# Allegro board my_pcb01.brd
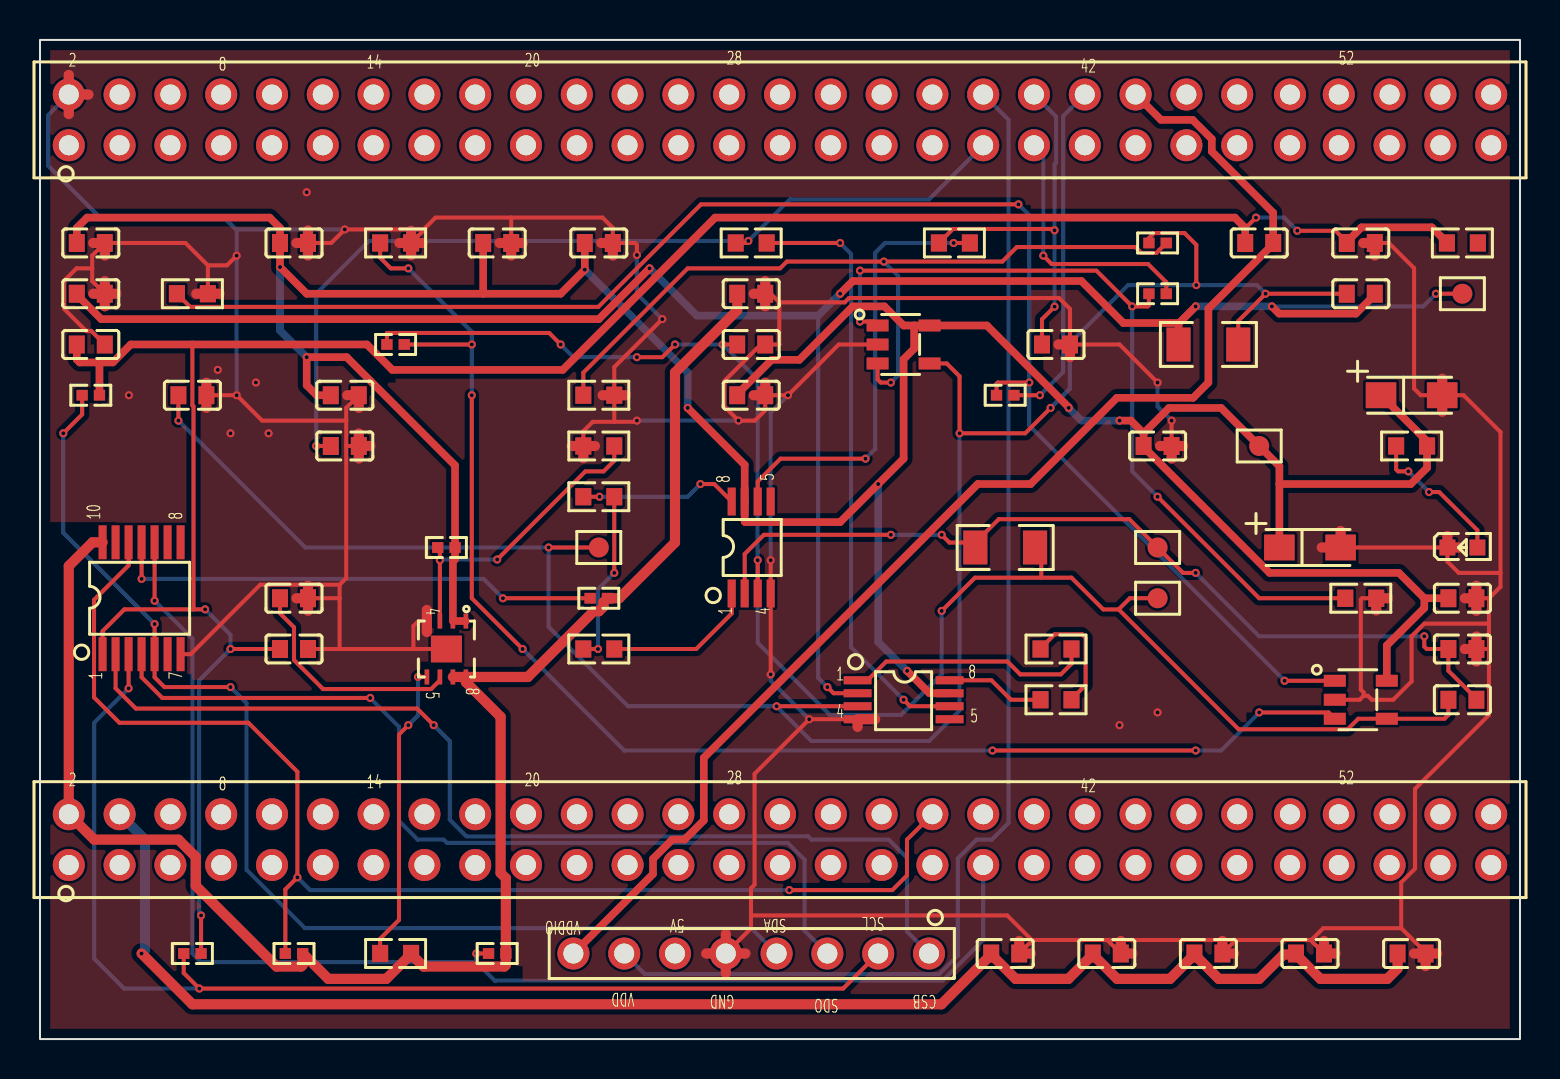
[diagram p0: board, top side]
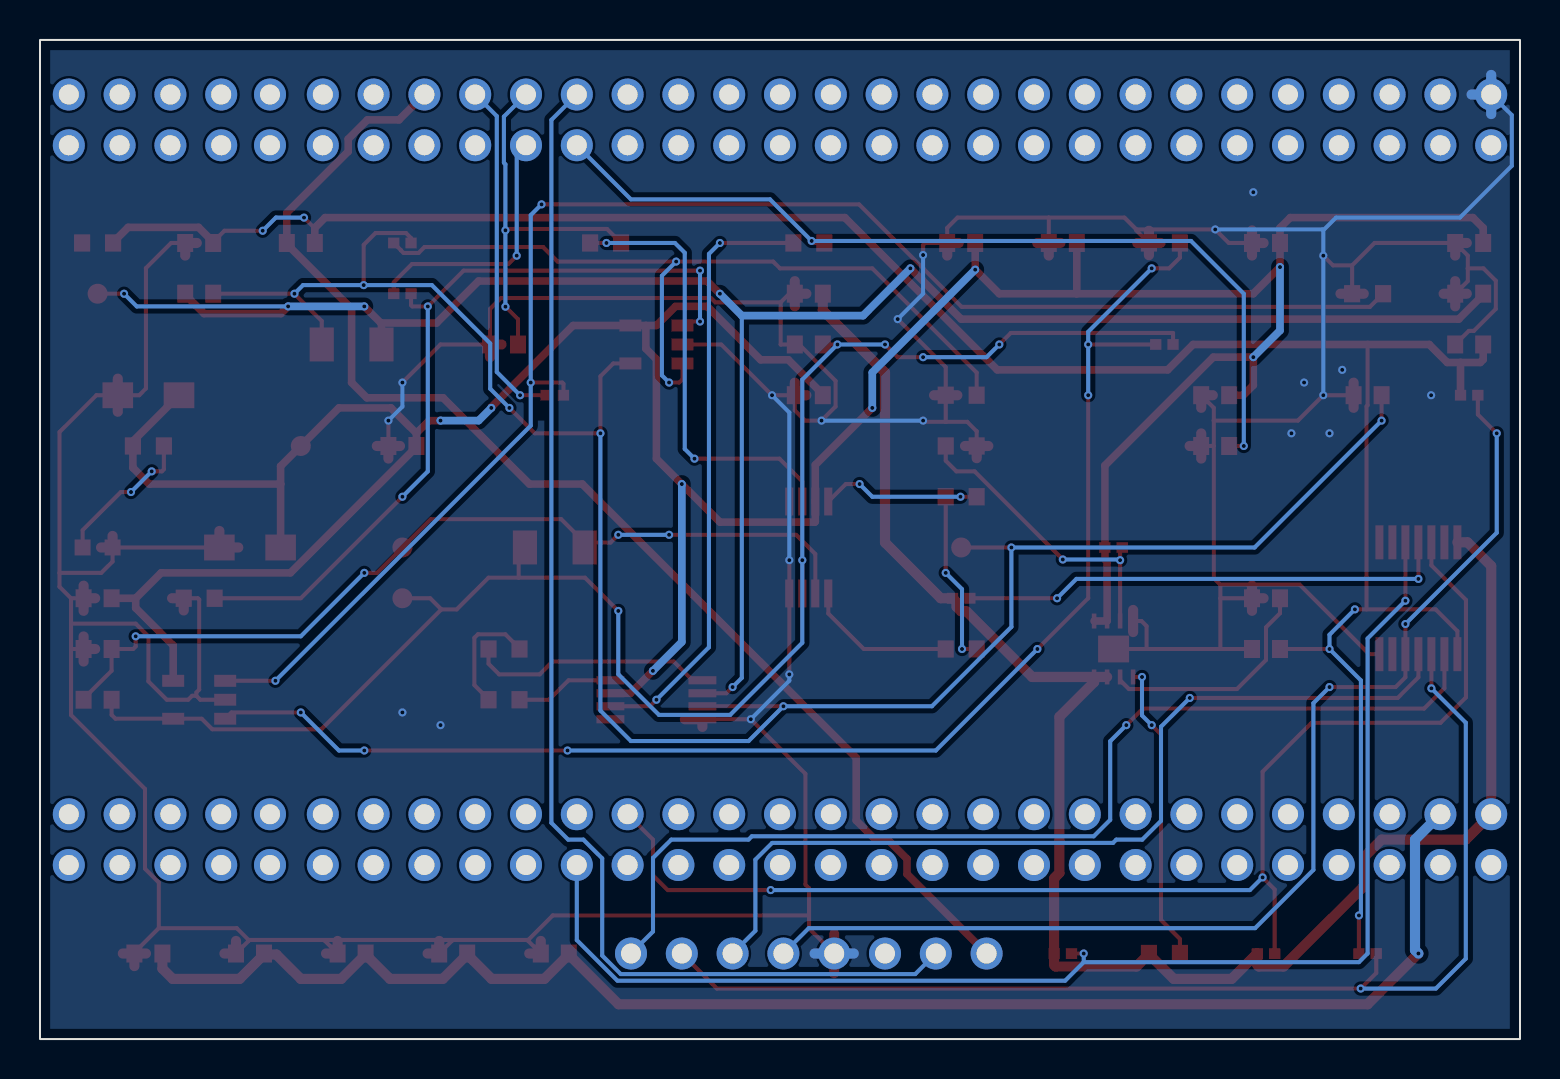
[diagram p1: board, bottom side, seen from below]

Outline 74 x 50 mm; copper layers: TOP, BOTTOM. Coordinates in mm from the lower left corner of the outline.
Outline path: rectangle 0,0 74,50

## Design rules (mm)
constraint set DEFAULT: min track width 0.203

## Placement (name value [footprint] x y rotation side)
C2  104  [C0603]  12.7 19.52 0 top
C3  104  [C0603]  2.54 34.76 0 top
C4  104  [C0603]  66.04 39.84 0 top
C5  104  [C0603]  48.26 4.28 0 top
C6  104  [C0603]  53.34 4.28 0 top
C7  104  [C0603]  58.42 4.28 0 top
C8  104  [C0603]  63.5 4.28 0 top
C9  104  [C0603]  68.58 4.28 0 top
C13  10uF  [C0603]  55.88 29.68 0 top
C14  10uF  [C0603]  27.94 39.84 0 top
C15  10uF  [C0603]  22.86 39.84 0 top
C16  10nF  [C0603]  35.56 34.76 0 top
C17  10nF  [C0603]  71.12 19.52 0 top
C18  10nF  [C0603]  71.12 16.98 0 top
C19  10nF  [C0603]  50.8 34.76 0 top
C20  10nF  [C0603]  66.04 37.3 0 top
C21  10nF  [C0603]  7.62 32.22 0 top
C22  10nF  [C0603]  2.54 37.3 0 top
C23  10nF  [C0603]  15.24 29.68 0 top
C24  10uF  [C0603]  15.24 32.22 0 top
C25  10uF  [C0603]  12.7 39.84 0 top
C26  10uF  [C0603]  71.12 22.06 0 top
C27  10uF  [C0603]  35.56 37.3 0 top
C28  10uF  [C0603]  35.56 32.22 0 top
C29  104  [C0603]  2.54 39.84 0 top
C30  10nF  [C0603]  12.7 22.06 0 top
C31  10uF  [CASE-A]  63.5 24.6 0 top
C32  10uF  [CASE-A]  68.58 32.22 0 top
C34  DNP  [C0603]  60.96 39.84 0 top
D1  YELLOW  [LED]  71.12 24.6 0 top
R5  4.7K  [R0402]  22.86 4.28 0 top
R6  4.7K  [R0402]  27.94 22.06 0 top
R7  4.7K  [R0402]  12.7 4.28 0 top
R8  100K  [R0603]  7.62 37.3 0 top
R9  4.7K  [R0402]  48.26 32.22 0 top
R10  10K  [R0603]  17.78 39.84 0 top
R11  4.7K  [R0402]  17.78 34.76 0 top
R12  10R  [R1206]  48.26 24.6 0 top
R13  470R  [R0603]  27.94 19.52 0 top
R14  0R  [R0603]  27.94 27.14 0 top
R15  100R  [R0603]  45.72 39.84 0 top
R16  100K  [R0603]  66.04 22.06 0 top
R17  10R  [R1206]  58.42 34.76 0 top
R18  4.7K  [R0402]  55.88 37.3 0 top
R19  10K  [R0603]  27.94 32.22 0 top
R20  4.7K  [R0402]  55.88 39.84 0 top
R21  470R  [R0603]  50.8 19.52 0 top
R22  0R  [R0603]  50.8 16.98 0 top
R23  100R  [R0603]  35.56 39.84 0 top
R24  4.7K  [R0402]  7.62 4.28 0 top
R25  4.7K  [R0402]  2.54 32.22 0 top
R26  4.7K  [R0402]  20.32 24.6 0 top
R27  10K  [R0603]  27.94 29.68 0 top
R28  1K  [R0603]  17.78 4.28 0 top
R29  1K  [R0603]  68.58 29.68 0 top
R31  0R  [R0603]  71.12 39.84 0 top
TP1  T POINT R  [TESTPOINT]  55.88 22.06 0 top
TP2  T POINT R  [TESTPOINT]  55.88 24.6 0 top
TP3  T POINT R  [TESTPOINT]  27.94 24.6 0 top
TP4  T POINT R  [TESTPOINT]  71.12 37.3 0 top
TP5  T POINT R  [TESTPOINT]  60.96 29.68 0 top
U3  pinheader_5802  [HDR2X29]  37 9.98 0 top
U4  pinheader_8  [HDR1X8]  35.56 4.28 180 top
U5  txs0104epwr  [TXS0104EPWR]  5.08 22.06 90 top
U6  LMV321/SOT  [LMV321]  66.04 16.98 0 top
U7  -  [COSINA333MRA]  35.56 24.6 90 top
U8  LMV321/SOT  [LMV321]  43.18 34.76 0 top
U9  -  [COSINA333MRA]  43.18 16.98 0 top
U11  pinheader_58  [HDR2X29]  37 46 0 top
U12  -  [TPS7A8001DRBR]  20.32 19.52 270 top

## Library data of the parts
C2-C9 C13-C30 C34 = CAP NP
C31 C32 = CAP POL
D1 = LED
R5-R29 R31 = R
TP1-TP5 = T POINT R
U3 = pinheader_5802
U4 = pinheader_8
U5 = txs0104epwr
U6 U8 = LMV321/SOT
U7 U9 = COSINA333MRA
U11 = pinheader_58
U12 = TPS7A8001DRBR

## Footprints (pads in the part's own frame, mm; a bottom-side part is the same pattern mirrored in y, then rotated)
C0603
  rect 0.8x0.9 smd: 1(-0.7,0) 2(0.7,0)
CASE-A
  rect 1.53x1.296 smd: 1(-1.53,0) 2(1.53,0)
COSINA333MRA
  rect 1.397x0.406 smd: 1(-2.3,0.975) 2(-2.3,0.325) 3(-2.3,-0.325) 4(-2.3,-0.975) 5(2.3,-0.975) 6(2.3,-0.325) 7(2.3,0.325) 8(2.3,0.975)
HDR1X8
  round 1.6 hole 1: 1(-8.89,0) 2(-6.35,0) 3(-3.81,0) 4(-1.27,0) 5(1.27,0) 6(3.81,0) 7(6.35,0) 8(8.89,0)
HDR2X29
  round 1.6 hole 1: 1(-35.56,-1.27) 2(-35.56,1.27) 3(-33.02,-1.27) 4(-33.02,1.27) 5(-30.48,-1.27) 6(-30.48,1.27) 7(-27.94,-1.27) 8(-27.94,1.27) 9(-25.4,-1.27) 10(-25.4,1.27) 11(-22.86,-1.27) 12(-22.86,1.27) 13(-20.32,-1.27) 14(-20.32,1.27) 15(-17.78,-1.27) 16(-17.78,1.27) 17(-15.24,-1.27) 18(-15.24,1.27) 19(-12.7,-1.27) 20(-12.7,1.27) 21(-10.16,-1.27) 22(-10.16,1.27) 23(-7.62,-1.27) 24(-7.62,1.27) 25(-5.08,-1.27) 26(-5.08,1.27) 27(-2.54,-1.27) 28(-2.54,1.27) 29(0,-1.27) 30(0,1.27) 31(2.54,-1.27) 32(2.54,1.27) 33(5.08,-1.27) 34(5.08,1.27) 35(7.62,-1.27) 36(7.62,1.27) 37(10.16,-1.27) 38(10.16,1.27) 39(12.7,-1.27) 40(12.7,1.27) 41(15.24,-1.27) 42(15.24,1.27) 43(17.78,-1.27) 44(17.78,1.27) 45(20.32,-1.27) 46(20.32,1.27) 47(22.86,-1.27) 48(22.86,1.27) 49(25.5,-1.27) 50(25.5,1.27) 51(27.94,-1.27) 52(27.94,1.27) 53(30.48,-1.27) 54(30.48,1.27) 55(33.02,-1.27) 56(33.02,1.27) 57(35.56,-1.27) 58(35.56,1.27)
LED
  rect 0.8x0.8 smd: 1(-0.749,0) 2(0.749,0)
LMV321
  rect 1.1x0.6 smd: 1(-1.3,0.95) 2(-1.3,0) 3(-1.3,-0.95) 4(1.3,-0.95) 5(1.3,0.95)
R0402
  rect 0.566x0.54 smd: 1(-0.433,0) 2(0.433,0)
R0603
  rect 0.806x0.864 smd: 1(-0.774,0) 2(0.774,0)
R1206
  rect 1.208x1.701 smd: 1(-1.493,0) 2(1.493,0)
TESTPOINT
  round 1 smd: 1(0,0)
TPS7A8001DRBR
  rect 0.75x0.23 smd: 1(-1.4,0.975) 2(-1.4,0.325) 3(-1.4,-0.325) 4(-1.4,-0.975) 5(1.4,-0.975) 6(1.4,-0.325) 7(1.4,0.325) 8(1.4,0.975)
  rect 1.34x1.55 smd: 9(0,0)
TXS0104EPWR
  rect 1.7x0.4 smd: 1(-2.8,1.95) 2(-2.8,1.3) 3(-2.8,0.65) 4(-2.8,0) 5(-2.8,-0.65) 6(-2.8,-1.3) 7(-2.8,-1.95) 8(2.8,-1.95) 9(2.8,-1.3) 10(2.8,-0.65) 11(2.8,0) 12(2.8,0.65) 13(2.8,1.3) 14(2.8,1.95)

## Nets
GND: C2.2 C3.2 C4.2 C5.2 C6.2 C7.2 C8.2 C9.2 C13.2 C14.2 C15.2 C16.2 C17.2 C19.2 C21.2 C22.2 C23.2 C24.2 C25.2 C26.2 C27.2 C28.2 C29.2 C30.2 C31.2 C32.2 D1.1(CATHODE) R8.2 R10.2 R16.2 R19.2 R27.1 U4.5 U5.7 U6.2 U7.4 U8.2 U9.4 U11.2 U12.4 U12.9
VCC_3V3: C5.1 C6.1 C7.1 C8.1 C9.1 U3.4
VCC_4V5: C13.1 C14.1 C15.1 C24.1 C25.1 C26.1 C28.1 C29.1 C31.1 C32.1 R26.2 R29.2 TP5.1(TP) U6.5 U7.7 U8.5 U9.7 U12.1 U12.2(OUT2)
VCC_5V: C27.1 R5.2 R6.2 R7.2 R28.2 U3.2 U5.14(VCCB) U12.7 U12.8
VCC_SENSOR: U4.7 U11.38
VCC_SENSOR_H: C2.1 C3.1 C4.1 C34.1 R24.2 R25.2 R31.1 U5.1
VDDIO: C34.2 U4.8 U11.44
CSB: U4.1 U5.2
CURRENT_ADC_OUT1: C19.1 R15.1 U11.40
CURRENT_ADC_OUT2: C23.1 R23.1 U11.37
IIC_CSB: U5.13
IIC_SCL: R7.1 U3.36 U5.12
IIC_SDA: R5.1 U3.37 U5.10
IIC_SDO: R6.1 U5.11
SCL_CLK: R24.1 U4.2 U5.3
SDA_MOSI: R25.1 U4.4 U5.5
SDO_MISO: U4.3 U5.4
TXS_OE: U5.8
VOLTAGE_IN1: R9.2 U11.42
VOLTAGE_IN2: R18.2 U11.39
VOLTAGE_OUT1+: C16.1 C18.1 R11.1 R12.2 TP1.1(TP) U6.4(OUT) U7.3
VOLTAGE_OUT1+_49853: R31.2
VOLTAGE_OUT1-: C17.1 C18.2 R12.1 TP2.1(TP) U7.2
VOLTAGE_OUT2+: C20.1 C21.1 R17.2 R20.1 TP3.1(TP) U8.4(OUT) U9.3
VOLTAGE_OUT2-: C20.2 C22.1 R17.1 TP4.1(TP) U9.2
N09182: R8.1 R9.1 U6.1
N09212: R10.1 R11.2 U6.3
N11610: R13.2 U7.1
N11630: R13.1 R14.2
N11634: R14.1 U7.8
N11682: R15.2 U7.6(VOUT)
N18467: R28.1 U12.5
N18885: R26.1 R27.2 U12.3
N19017: C30.1 U12.6
N20804: D1.2 R29.1
N24026: R16.1 R18.1 U8.1
N24044: R19.1 R20.2 U8.3
N24078: R21.2 U9.1
N24082: R21.1 R22.2
N24084: R22.1 U9.8
N24106: R23.2 U9.6(VOUT)

Pads without a net: U3 1 3 5 6 7 8 9 10 11 12 13 14 15 16 17 18 19 20 21 22 23 24 25 26 27 28 29 30 31 32 33 34 35 38 39 40 41 42 43 44 45 46 47 48 49 50 51 52 53 54 55 56 57 58; U4 6; U5 6 9; U7 5; U9 5; U11 1 3 4 5 6 7 8 9 10 11 12 13 14 15 16 17 18 19 20 21 22 23 24 25 26 27 28 29 30 31 32 33 34 35 36 41 43 45 46 47 48 49 50 51 52 53 54 55 56 57 58

## Via types
v1: diameter 0.406, hole 0.203, TOP to BOTTOM, 107 vias

## Routing (per net, layer and track width the routed paths; a pad name or vN(x,y) marks a point on that pad's centre or on a via; arc(x,y) is an arc through that point)
GND: length 367.1
  TOP w0.203: 63.57,4.96 63.57,4.91 C8.2 ; 63.57,4.96 64.16,5.55 68.06,5.55 ; 63.57,4.96 59.75,4.96 ; 53.41,4.96 49.59,4.96 ; 53.41,4.96 59.75,4.96 ; 53.41,4.96 53.41,4.91 C6.2 ; 49.59,4.96 48.36,6.18 35.55,6.18 ; 49.59,4.96 49.59,4.91 C5.2 ; C13.2 v1(56.58,30.95) ; C26.2 72.45,22.06 ; 72.45,22.06 72.45,20.79 ; 72.45,22.06 73.03,22.64 73.03,23.33 ; U6.2 65.98,16.98 66.18,17.18 ; 36.97,36.87 36.53,37.3 C27.2 ; 36.97,36.87 36.97,34.76 36.96,34.76 C16.2 36.04,34.76 34.22,32.94 34.22,31.65 v1(34.92,30.95) 35.74,30.95 36.26,31.47 C28.2 v1(37.4,32.22) 39.94,34.76 U8.2 ; 36.97,36.87 40.24,36.87 40.45,37.08 50.95,37.08 51.5,36.54 C19.2 53.98,34.76 v1(55.88,32.85) ; 18.67,19.52 18.67,20.67 18.93,20.92 U12.4 ; 18.67,19.52 U12.9 ; 18.67,19.52 14.98,19.52 ; R27.1 27.17,30.42 27.64,30.89 28.71,30.89 ; v1(29.84,30.95) 29.78,30.89 28.71,30.89 ; 15.31,30.95 15.31,31.59 C24.2 ; 15.31,30.95 15.31,29.68 ; 15.31,30.95 11.1,30.95 v1(9.83,32.22) C21.2 ; U4.5 35.55,5.54 35.55,6.18 ; 72.45,20.79 69.21,20.79 68.58,20.16 68.58,17.9 67.66,16.98 66.59,16.98 66.39,17.18 66.18,17.18 ; 72.45,20.79 72.45,19.52 ; 28.71,30.89 R19.2 28.71,33.63 v1(31.11,36.03) ; 14.98,22.06 14.98,19.52 ; 14.98,22.06 C30.2 ; 14.98,22.06 14.98,22.74 ; 14.98,19.52 C2.2 ; 72.45,19.52 C17.2 ; 72.45,19.52 72.45,16.22 68.75,12.52 68.75,8.53 68.06,7.84 68.06,5.55 ; R16.2 66.11,22.06 66.04,21.99 66.04,17.49 66.18,17.35 66.18,17.18 ; C31.2 D1.1 70.37,23.9 70.94,23.33 73.03,23.33 ; 35.55,6.18 35.55,7.55 35.73,7.73 35.73,13.27 v1(38.46,16) U9.4 ; 73.03,23.33 73.03,30.37 71.18,32.22 C32.2 69.04,32.22 68.7,32.56 68.7,38.58 67.44,39.84 C4.2 ; U5.7 7.53,19.26 11.01,22.74 14.98,22.74 ; 14.98,22.74 15.31,23.07 15.31,29.68 ; C25.2 14.56,39.84 v1(15.24,40.52) 19.19,40.52 ; 59.75,4.96 59.75,4.91 C7.2 ; 68.06,5.55 69.28,4.33 C9.2 ; 19.19,40.52 19.19,40.47 R10.2 ; 19.19,40.52 19.78,41.11 23.56,41.11 ; v1(9.83,39.2) 9.35,38.72 8.39,38.72 ; 2.61,38.57 2.61,37.93 C22.2 ; 2.61,38.57 2.61,39.21 C29.2 7.27,39.84 8.39,38.72 ; 2.61,38.57 1.83,38.57 1.21,37.95 1.21,36.53 2.31,35.44 2.56,35.44 C3.2 ; R8.2 8.39,38.72 ; C15.2 23.56,41.11 ; 23.56,41.11 28.12,41.11 28.64,40.59 C14.2 29.75,39.84 29.84,39.75 v1(29.84,39.24) ; 15.31,29.68 C23.2 ; v1(36.54,18.25) U7.4 v1(36.54,23.96)
  TOP w0.508: C25.2 13.4,40.47 ; C25.2 12.82,39.84 ; C25.2 13.4,39.21 ; 15.94,29.05 C23.2 ; C23.2 15.94,30.31 ; C23.2 16.52,29.68 ; 70.11,31.39 C32.2 70.11,33.05 ; 2.66,37.3 C22.2 ; C22.2 3.82,37.3 ; C22.2 3.24,36.67 ; C22.2 3.24,37.93 ; 27.17,29.07 R27.1 ; R27.1 27.75,29.68 ; R27.1 26.58,29.68 ; 8.32,31.59 C21.2 8.32,32.85 ; 18.55,39.23 R10.2 ; R10.2 18.55,40.45 ; R10.2 19.14,39.84 ; R10.2 17.97,39.84 ; 13.4,21.43 C30.2 ; C30.2 12.82,22.06 ; C30.2 13.4,22.69 ; 35.68,32.22 C28.2 36.26,32.85 ; 64.78,4.28 C8.2 64.2,4.91 ; 28.06,39.84 C14.2 28.64,39.21 ; 28.13,32.22 R19.2 29.3,32.22 ; U11.2 2.42,47.27 ; U11.2 1.44,48.25 ; U11.2 1.44,46.29 ; 19.34,20.37 U12.4 19.34,21.47 ; 64.09,24.6 C31.2 65.03,25.43 ; 49.54,4.28 C5.2 48.96,4.91 ; 71.24,22.06 C26.2 ; C26.2 71.82,21.43 ; C26.2 71.82,22.69 ; 70.95,24.6 D1.1 70.37,25.18 ; C9.2 69.86,4.28 ; C9.2 69.28,3.65 ; C9.2 68.7,4.28 ; U4.5 35.27,4.28 ; U4.5 34.29,5.26 ; U4.5 34.29,3.3 ; U4.5 33.31,4.28 ; 54.04,4.91 C6.2 54.62,4.28 ; 66.16,39.84 C4.2 66.74,39.21 ; 15.94,31.59 C24.2 15.36,32.22 ; 22.98,39.84 C15.2 ; C15.2 24.14,39.84 ; C15.2 23.56,39.21 ; 50.92,34.76 C19.2 51.5,34.13 ; 59.7,4.28 C7.2 59.12,4.91 ; C13.2 57.16,29.68 ; C13.2 56.58,29.05 ; C13.2 56,29.68 ; 66.81,21.45 R16.2 67.4,22.06 ; 8.98,37.3 R8.2 7.81,37.3 ; C27.2 36.26,37.93 ; C27.2 35.68,37.3 ; C27.2 36.26,36.67 ; 2.66,39.84 C29.2 3.24,39.21 ; 40.88,15.62 U9.4 41.76,16 ; 71.82,18.89 C17.2 ; C17.2 71.24,19.52 ; C17.2 71.82,20.15
  BOTTOM w0.203: 9.83,40.47 9.2,41.11 3,41.11 0.41,43.7 0.41,46.24 U11.2 ; 9.83,40.47 9.88,40.52 v1(15.24,40.52) ; 9.83,40.47 v1(9.83,39.2) v1(9.83,32.22) ; v1(56.58,30.95) 55.88,31.65 v1(55.88,32.85) ; v1(31.11,36.03) 29.84,37.3 v1(29.84,39.24) ; v1(36.54,23.96) 36.54,31.36 v1(37.4,32.22) ; v1(36.54,18.25) 36.54,17.93 v1(38.46,16) ; v1(29.84,30.95) v1(34.92,30.95)
  BOTTOM w0.508: U11.2 2.42,47.27 ; U11.2 1.44,48.25 ; U11.2 1.44,46.29 ; 35.27,4.28 U4.5 33.31,4.28
  vias: v1(4.45,32.22) v1(8.89,33.49) v1(9.53,30.31) v1(10.79,32.85) v1(11.43,30.31) v1(13.34,42.38) v1(53.98,15.71) v1(55.88,16.34)
VCC_3V3: length 77.2
  TOP w0.508: 57.72,4.23 C7.1 ; 57.72,4.23 58.94,3.01 60.96,3.01 62.18,4.23 62.8,4.23 ; 57.72,4.23 56.5,3.01 53.86,3.01 52.64,4.23 ; 62.8,4.23 64.02,3.01 67.36,3.01 67.88,3.53 C9.1 ; 62.8,4.23 C8.1 ; 52.64,4.23 C6.1 ; 52.64,4.23 51.42,3.01 48.78,3.01 47.56,4.23 ; 47.56,4.23 45.07,1.74 7.62,1.74 v1(5.08,4.28) ; 47.56,4.23 C5.1
  BOTTOM w0.508: U3.4 5.25,9.98 5.25,4.45 v1(5.08,4.28)
VCC_4V5: length 177.8
  TOP w0.381: v1(53.98,30.95) 54.54,30.95 55.18,30.31 ; 61.97,27.77 61.97,28.67 TP5.1 59.05,31.58 56.45,31.58 55.18,30.31 ; 61.97,27.77 68.54,27.77 69.35,28.59 R29.2 69.35,29.92 C32.1 ; 61.97,27.77 C31.1 ; 69.21,22.06 69.21,21.57 67.34,19.7 U6.5 ; 69.21,22.06 C26.1 ; 69.21,22.06 67.94,23.33 61.48,23.33 55.18,29.63 C13.1 55.18,30.31 ; C24.1 13.84,32.22 13.34,32.72 v1(13.34,34.12) 15.33,34.12 20.75,28.71 R26.2 20.75,24.01 20.65,23.9 U12.2 U12.1 ; U9.7 44.48,17.31 v1(43.36,18.43) ; 43.71,35.71 43.18,35.71 42.22,36.66 40.64,36.66 37.97,33.99 36.58,33.99 34.86,32.27 C28.1 ; 43.71,35.71 43.71,34.55 43.18,34.02 43.18,29.04 v1(41.91,27.77) 40.01,25.87 35.26,25.87 35.23,25.9 U7.7 35.23,28.74 v1(32.38,31.58) ; 43.71,35.71 U8.5 47.34,35.71 51.44,31.62 v1(51.44,31.58) ; C29.1 1.84,40.59 2.36,41.11 11.48,41.11 12,40.59 C25.1 v1(12,38.63) 13.34,37.3 22.16,37.3 ; 22.16,37.3 C15.1 ; 22.16,37.3 26.04,37.3 v1(27.24,38.5) C14.1
  BOTTOM w0.381: v1(53.98,30.95) 52.07,30.95 v1(51.44,31.58) ; v1(43.36,18.43) 41.91,19.87 v1(41.91,27.77) ; v1(12,38.63) 12,35.46 v1(13.34,34.12) ; v1(27.24,38.5) 32.38,33.36 v1(32.38,31.58)
VCC_5V: length 85.4
  TOP w0.508: U5.14 2.63,24.86 1.44,23.67 U3.2 2.71,9.98 6.92,9.98 7.79,9.11 7.79,7.66 11.83,3.63 13.06,3.63 13.13,3.71 R7.2 13.15,4.28 14.42,3.01 17.31,3.01 18.55,4.25 ; U12.8 21.3,17.86 23.03,16.13 23.03,8.31 23.29,8.05 R5.2 23.29,3.71 23.22,3.63 19.18,3.63 18.55,4.25 ; U12.8 U12.7 ; U12.8 24.39,18.12 27.68,21.41 27.95,21.41 28.17,21.63 28.17,21.86 R6.2 28.96,22.06 31.75,24.85 31.75,33.36 34.86,36.47 C27.1 ; R28.2 18.55,4.25
VCC_SENSOR: length 62.6
  BOTTOM w0.203: U11.38 48.43,46 48.43,10.82 47.59,9.98 46.83,9.98 45.89,9.04 45.89,4.18 44.96,3.25 30.24,3.25 U4.7
VCC_SENSOR_H: length 118.3
  TOP w0.203: R24.2 v1(8.05,6.18) ; 7.67,21.5 4.22,21.5 3.13,20.41 U5.1 ; 7.67,21.5 v1(8.26,21.5) ; 7.67,21.5 7.67,31.66 7.62,31.72 7.62,34.76 ; v1(62.87,40.45) 64.78,40.45 65.34,39.89 ; C2.1 v1(9.53,19.52) ; 60.26,40.59 60.28,40.59 v1(60.8,41.11)
  TOP w0.381: C34.1 60.26,40.59 59.74,41.11 33.76,41.11 26.14,33.49 17.61,33.49 16.34,34.76 4.54,34.76 3.64,33.86 2.97,33.86 ; 2.97,33.86 1.99,33.86 1.84,34.01 C3.1 ; 2.97,33.86 R25.2 ; R31.1 70.35,39.87 69.59,40.62 66.07,40.62 65.34,39.89 C4.1
  BOTTOM w0.203: v1(62.87,40.45) 62.21,41.11 v1(60.8,41.11) ; v1(8.05,6.18) 7.96,6.28 7.96,17.95 v1(9.53,19.52) 9.53,20.23 v1(8.26,21.5)
VDDIO: length 65.4
  TOP w0.381: U11.44 56.05,46 57.63,46 58.59,45.04 58.59,44.42 61.66,41.35 C34.2 61.66,39.79 58.42,36.55 58.42,32.85 57.66,32.09 53.85,32.09 49.53,27.77 46.89,27.77 33.19,14.08 33.19,10.94 32.23,9.98 31.61,9.98 30.65,9.02 30.65,8.26 U4.8
CSB: length 52.3
  TOP w0.203: v1(19.68,15.71) 18.86,16.54 4.8,16.54 3.78,17.55 U5.2
  BOTTOM w0.203: U4.1 43.35,5.38 43.35,9.07 42.44,9.98 38.57,9.98 38.41,10.15 21.32,10.15 20.49,10.97 20.49,14.9 v1(19.68,15.71)
CURRENT_ADC_OUT1: length 19.4
  TOP w0.203: v1(50.73,36.65) 50.1,36.02 C19.1 ; v1(50.73,40.47) 50.66,40.54 45.65,40.54 R15.1
  BOTTOM w0.203: U11.40 50.8,46.17 50.8,43.85 50.73,43.78 v1(50.73,40.47) v1(50.73,36.65)
CURRENT_ADC_OUT2: length 45.5
  TOP w0.203: C23.1 v1(13.81,29.68) ; v1(35.42,39.94) 35.32,39.84 R23.1
  BOTTOM w0.203: U11.37 44.45,42.02 37.5,42.02 v1(35.42,39.94) 16.45,39.94 13.81,37.3 v1(13.81,29.68)
IIC_SCL: length 64.2
  TOP w0.203: R7.1 12.27,7.49 v1(12.87,8.09) 12.87,13.38 10.42,15.83 3.97,15.83 2.7,17.1 2.7,21.98 4.43,23.71 U5.12 ; v1(37.47,7.45) 42.62,7.45 43.35,8.19 43.35,9.98 U3.36
  BOTTOM w0.203: v1(37.47,7.45) 13.5,7.45 v1(12.87,8.09)
IIC_SDA: length 67.1
  TOP w0.203: U5.10 v1(5.73,21.94) ; R5.1 v1(21.81,4.28)
  BOTTOM w0.203: 21.81,3.85 22.74,2.92 45.13,2.92 47.16,4.95 U3.37 ; 21.81,3.85 v1(21.81,4.28) ; 21.81,3.85 8.05,3.85 7.62,4.28 7.62,20.04 v1(5.73,21.94)
IIC_SDO: length 24.7
  TOP w0.203: R6.1 v1(23.15,22.06) ; U5.11 v1(5.08,23.03)
  BOTTOM w0.203: v1(5.08,23.03) 22.18,23.03 v1(23.15,22.06)
SCL_CLK: length 58.6
  TOP w0.203: U4.2 40.16,2.53 v1(7.97,2.53) 7.19,3.31 R24.1 ; U5.3 v1(4.43,17.55)
  BOTTOM w0.203: v1(4.43,17.55) 2.71,15.83 2.71,4.02 4.2,2.53 v1(7.97,2.53)
SDA_MOSI: length 58.1
  TOP w0.203: v1(1.16,30.31) 2.11,31.26 R25.1 ; v1(5.73,20.77) U5.5 5.73,18.11 6.22,17.61 v1(9.53,17.61)
  BOTTOM w0.203: v1(5.73,20.77) 1.16,25.34 v1(1.16,30.31) ; U4.4 35.56,5.55 13.24,5.55 10.33,8.46 10.33,16.81 v1(9.53,17.61)
SDO_MISO: length 46
  TOP w0.203: v1(16.51,17.07) 6.11,17.07 5.08,18.11 U5.4
  BOTTOM w0.203: U4.3 38.23,5.42 38.23,8.98 37.39,9.81 20.35,9.81 20.18,9.98 18.89,9.98 17.95,10.92 17.95,15.63 v1(16.51,17.07)
VOLTAGE_IN1: length 17.3
  TOP w0.203: R9.2 v1(50,32.22)
  BOTTOM w0.203: v1(50,32.22) 51.16,33.38 51.16,46.19 U11.42
VOLTAGE_IN2: length 13
  TOP w0.203: v1(50.16,39.2) 50.58,38.79 55.4,38.79 56.31,37.87 R18.2
  BOTTOM w0.203: v1(50.16,39.2) 50.16,44.26 U11.39
VOLTAGE_OUT1+: length 84.9
  TOP w0.203: v1(26.04,34.76) 25.46,35.33 17.35,35.33 R11.1 ; TP1.1 54.49,22.06 53.93,21.5 ; v1(45.09,21.42) 46.75,23.09 50.06,23.09 ; 53.93,21.5 59.93,15.5 65.38,15.5 65.91,16.03 U6.4 70.22,16.03 70.42,16.23 C18.1 ; 53.93,21.5 53.16,21.5 51.58,23.09 50.06,23.09 ; v1(31.75,34.76) 31.11,34.12 v1(29.84,34.12) ; 50.06,23.09 50.06,24.29 R12.2 ; U7.3 v1(35.89,23.96) ; C16.1 v1(34.13,34.76)
  BOTTOM w0.203: v1(31.75,34.76) v1(34.13,34.76) 35.89,33 v1(35.89,23.96) 35.89,19.83 39.49,16.22 43.05,16.22 45.09,18.25 v1(45.09,21.42) ; v1(26.04,34.76) 26.67,34.12 v1(29.84,34.12)
VOLTAGE_OUT1-: length 44.6
  TOP w0.203: v1(69.22,20.15) 69.22,19.65 69.34,19.52 C17.1 70.42,18.43 71.82,17.03 C18.2 ; R12.1 46.77,24.85 ; 46.77,24.85 45.47,24.85 v1(45.09,25.23) ; 46.77,24.85 47.94,26.02 54.46,26.02 TP2.1 57.15,23.33 v1(57.78,23.33) ; U7.2 35.23,24.28 36.19,25.23 v1(42.55,25.23)
  BOTTOM w0.203: v1(57.78,23.33) 60.96,20.15 v1(69.22,20.15) ; v1(42.55,25.23) v1(45.09,25.23)
VOLTAGE_OUT2+: length 107
  TOP w0.203: C21.1 v1(6.92,30.95) ; R17.2 59.91,35.93 v1(61.28,37.3) C20.1 ; U8.4 45.33,33.81 45.98,33.17 v1(45.98,30.31) 49.26,30.31 v1(50.53,31.58) ; TP3.1 v1(25.43,24.6) ; v1(57.82,37.73) 57.82,39.75 57.22,40.34 55.7,40.34 55.45,40.08 R20.1 ; U9.3 v1(36.83,16.65)
  BOTTOM w0.203: v1(6.92,30.95) 13.27,24.6 v1(25.43,24.6) 25.43,20.63 29.4,16.65 v1(36.83,16.65) 38.57,14.91 44.45,14.91 45.98,16.44 v1(45.98,30.31) ; v1(50.53,31.58) 51.49,32.55 51.49,34.82 54.41,37.73 v1(57.82,37.73) 60.85,37.73 v1(61.28,37.3)
VOLTAGE_OUT2-: length 101.3
  TOP w0.203: v1(39.37,17.61) 39.68,17.31 U9.2 ; TP4.1 v1(69.8,37.3)
  TOP w0.381: v1(30.48,38.57) 27.94,36.03 3.06,36.03 1.84,37.25 C22.1 ; v1(57.78,36.66) 56.96,35.84 56.93,35.84 ; v1(61.59,36.66) 61.95,36.31 65.8,36.31 66.74,37.25 C20.2 ; 56.93,35.84 54.17,35.84 52.07,37.93 40.64,37.93 v1(40.01,37.3) ; 56.93,35.84 R17.1
  BOTTOM w0.203: v1(61.59,36.66) 69.16,36.66 v1(69.8,37.3) ; 38.91,36.2 38.91,18.08 v1(39.37,17.61)
  BOTTOM w0.381: v1(57.78,36.66) v1(61.59,36.66) ; v1(30.48,38.57) 32.85,36.2 38.91,36.2 v1(40.01,37.3)
N09182: length 78.6
  TOP w0.203: R8.1 7.51,36.64 27.91,36.64 33.05,41.77 v1(48.92,41.77) ; U6.1 v1(62.23,17.93) ; R9.1 47.83,32.79 47.89,32.85 v1(49.46,32.85)
  BOTTOM w0.203: v1(48.92,41.77) 49.46,41.23 v1(49.46,32.85) 49.46,30.7 v1(62.23,17.93)
N09212: length 70.8
  TOP w0.203: v1(21.59,32.22) 21.59,22.06 v1(24.13,19.52) ; v1(18.41,38.57) 17.54,38.57 17.01,39.1 R10.1 ; v1(47.62,14.44) v1(57.78,14.44) ; R11.2 v1(21.59,34.76) ; U6.3 64.43,16.34 v1(60.96,16.34)
  BOTTOM w0.203: v1(57.78,14.44) 59.05,14.44 v1(60.96,16.34) ; v1(24.13,19.52) 29.21,14.44 v1(47.62,14.44) ; v1(21.59,32.22) v1(21.59,34.76) 21.59,35.39 v1(18.41,38.57)
N11610: length 7.6
  TOP w0.203: U7.1 34.58,21.3 32.81,19.52 R13.2
N11630: length 8.7
  TOP w0.203: R14.2 v1(28.71,23.33) ; R13.1 v1(27.9,19.52)
  BOTTOM w0.203: v1(27.9,19.52) 27.9,22.52 v1(28.71,23.33)
N11634: length 8
  TOP w0.203: v1(33.02,27.77) 33.71,27.77 U7.8 ; R14.1 v1(27.98,27.14)
  BOTTOM w0.203: v1(27.98,27.14) 32.38,27.14 v1(33.02,27.77)
N11682: length 22.3
  TOP w0.203: v1(41.27,29.04) 37.03,29.04 35.89,27.9 U7.6 ; R15.2 v1(45.68,39.84)
  BOTTOM w0.203: v1(41.27,29.04) 41.76,29.53 41.76,39.35 42.25,39.84 v1(45.68,39.84)
N18467: length 15.1
  TOP w0.203: v1(18.41,15.71) 17.95,15.24 17.95,5.96 17.01,5.02 R28.1 ; U12.5 v1(18.9,18.12)
  BOTTOM w0.203: v1(18.9,18.12) 18.9,16.19 v1(18.41,15.71)
N18885: length 15.2
  TOP w0.203: v1(22.86,24) 27.27,28.41 28.18,28.41 28.71,28.94 R27.2 ; R26.1 19.99,24.49 v1(19.99,23.96) U12.3
  BOTTOM w0.203: v1(22.86,24) 20.03,24 v1(19.99,23.96)
N19017: length 11.6
  TOP w0.203: C30.1 12,21.31 12.7,20.61 12.7,18.97 14.15,17.52 19.55,17.52 19.99,17.96 U12.6
N20804: length 7.4
  TOP w0.203: v1(68.42,28.41) 67.91,28.41 67.81,28.51 R29.1 ; v1(69.45,27.38) 69.96,27.38 71.87,25.46 D1.2
  BOTTOM w0.203: v1(68.42,28.41) v1(69.45,27.38)
N24026: length 40.8
  TOP w0.203: v1(55.88,27.14) 60.96,22.06 R16.1 ; v1(41,35.91) 41.68,35.91 U8.1 ; R18.1 55.45,36.73 55.39,36.66 v1(54.61,36.66) 52.82,38.46 v1(41,38.46)
  BOTTOM w0.203: v1(55.88,27.14) 54.61,28.41 v1(54.61,36.66) ; v1(41,35.91) v1(41,38.46)
N24044: length 41.2
  TOP w0.203: U8.3 41.88,33.01 42.04,32.85 v1(42.55,32.85) ; R20.2 55.96,39.49 55.96,39.48 55.82,39.34 55.07,39.34 54.77,39.64 48.84,39.64 48.12,38.91 v1(42.19,38.91) 37.34,38.91 37,38.57 32.38,38.57 27.17,33.35 R19.1
  BOTTOM w0.203: v1(42.19,38.91) 42.9,38.2 42.9,33.21 v1(42.55,32.85)
N24078: length 12.3
  TOP w0.203: R21.2 51.57,18.78 51.04,18.25 49.01,18.25 48.37,18.89 42.32,18.89 41.38,17.96 U9.1
N24082: length 6
  TOP w0.203: R21.1 50.03,19.55 50.73,20.26 52.1,20.26 52.28,20.08 52.28,17.72 51.57,17.01 R22.2
N24084: length 4.9
  TOP w0.203: U9.8 47.57,17.96 48.55,16.98 R22.1
N24106: length 30.3
  TOP w0.203: U9.6 43.51,16.65 v1(43.18,16.98) ; R23.2 v1(40.01,39.84)
  BOTTOM w0.203: v1(40.01,39.84) 40.55,39.29 40.55,19.61 v1(43.18,16.98)

## Copper pours and planes (outline as drawn; the poured copper is in the pictures)
GND on TOP: 0.51,49.49 73.49,49.49 73.49,0.51 0.51,0.51 0.51,11.26 2.37,11.26 2.36,11.17 2.35,11.06 2.92,10.49 3.19,10.49 3.28,10.55 3.27,10.66 3.11,10.93 3.05,11.25 3.05,11.26 3.81,11.26 3.81,12.16 3.89,12.17 3.98,12.18 4.64,11.91 4.91,11.25 4.85,10.93 4.69,10.66 4.68,10.55 4.77,10.49 5.73,10.49 5.82,10.55 5.81,10.66 5.65,10.93 5.59,11.25 6.52,12.18 7.45,11.25 7.37,10.88 7.16,10.58 7.13,10.49 7.18,10.42 7.23,10.38 7.28,10.34 8.15,9.47 8.19,9.42 8.23,9.37 8.3,9.32 8.39,9.35 8.69,9.56 9.06,9.64 9.99,8.71 9.06,7.78 8.74,7.84 8.47,8 8.36,8.01 8.3,7.92 8.3,7.88 11.77,4.4 11.83,4.39 11.86,4.44 11.86,4.55 11.87,4.6 11.9,4.64 11.91,4.66 11.91,7.49 11.94,7.62 12.02,7.74 12.11,7.84 12.05,7.9 12.02,7.88 11.82,7.81 11.6,7.78 10.67,8.71 11.6,9.64 12.01,9.54 12.33,9.28 12.45,9.25 12.51,9.34 12.51,10.62 12.45,10.71 12.33,10.68 12.01,10.42 11.6,10.32 10.67,11.25 11.6,12.18 12.01,12.08 12.33,11.82 12.45,11.79 12.51,11.88 12.51,13.23 10.27,15.47 3.97,15.47 3.89,15.48 3.81,15.51 3.81,16.49 4.12,16.18 4.4,16.18 4.49,16.25 4.47,16.36 3.81,17.02 3.81,20.24 5.37,20.24 5.37,20.77 5.39,20.88 5.45,20.99 5.46,21.09 5.37,21.15 4.37,21.15 3.81,20.59 3.81,21.6 3.97,21.76 4.08,21.83 4.22,21.86 5.37,21.86 5.37,22.61 5.33,22.7 5.23,22.71 5.16,22.68 5.08,22.67 4.83,22.78 4.72,23.03 4.72,23.25 4.66,23.34 4.55,23.32 3.81,22.58 3.81,23.59 3.93,23.71 3.95,23.82 3.86,23.88 3.81,23.88 3.81,25.87 0.51,25.87 ; 22 cut-outs
GND on BOTTOM: 73.49,0.51 0.51,0.51 0.51,49.49 73.49,49.49 ; 21 cut-outs

## Text on the board
NCLEGEND-1-2: FIGURE | FINISHED_SIZE | 8.0 | 39.37 | DRILL CHART: TOP to BOTTOM | ALL UNITS ARE IN MILS | DRILLED_SIZE | - | PLATED | QTY | 107 | 124
